# Altium PCB XbeeBed.PcbDoc
Units mm, origin at the board's own origin, x right, y up, seen from the top; angles counter-clockwise.
Board outline 152.4 x 101.6 mm, 2 copper layers (Top Layer, Bottom Layer); 31 components, 23 nets, 137 pads, 9 vias.
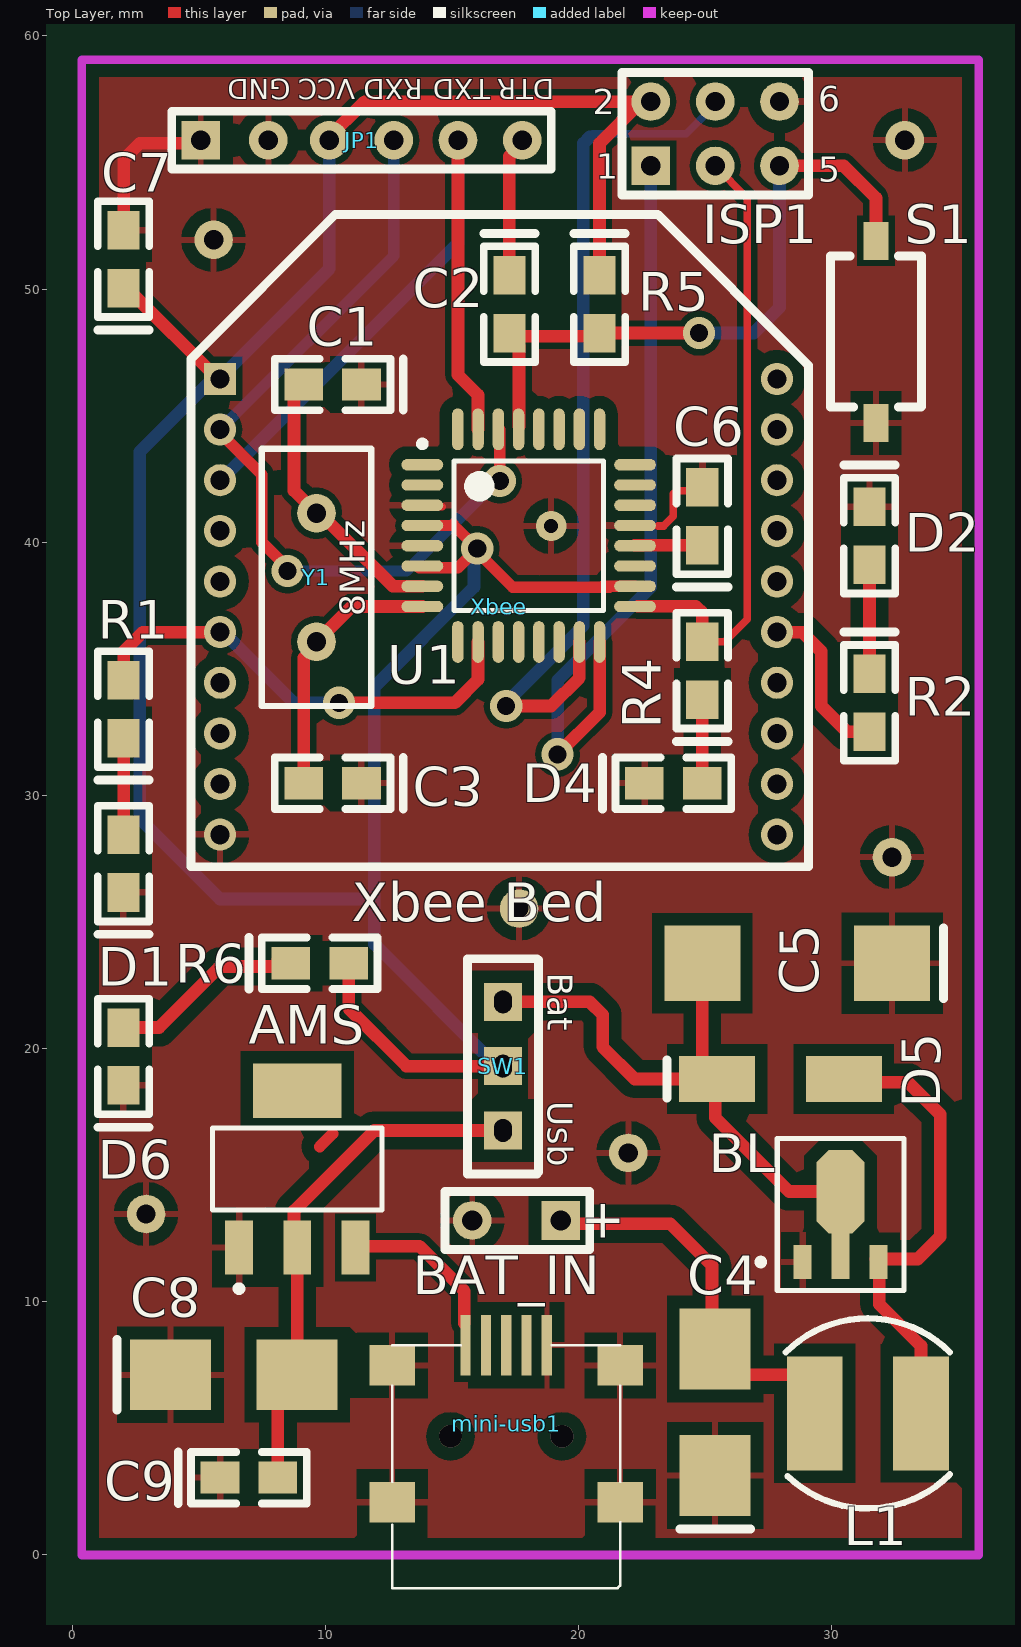
[diagram p0: Top Layer view]
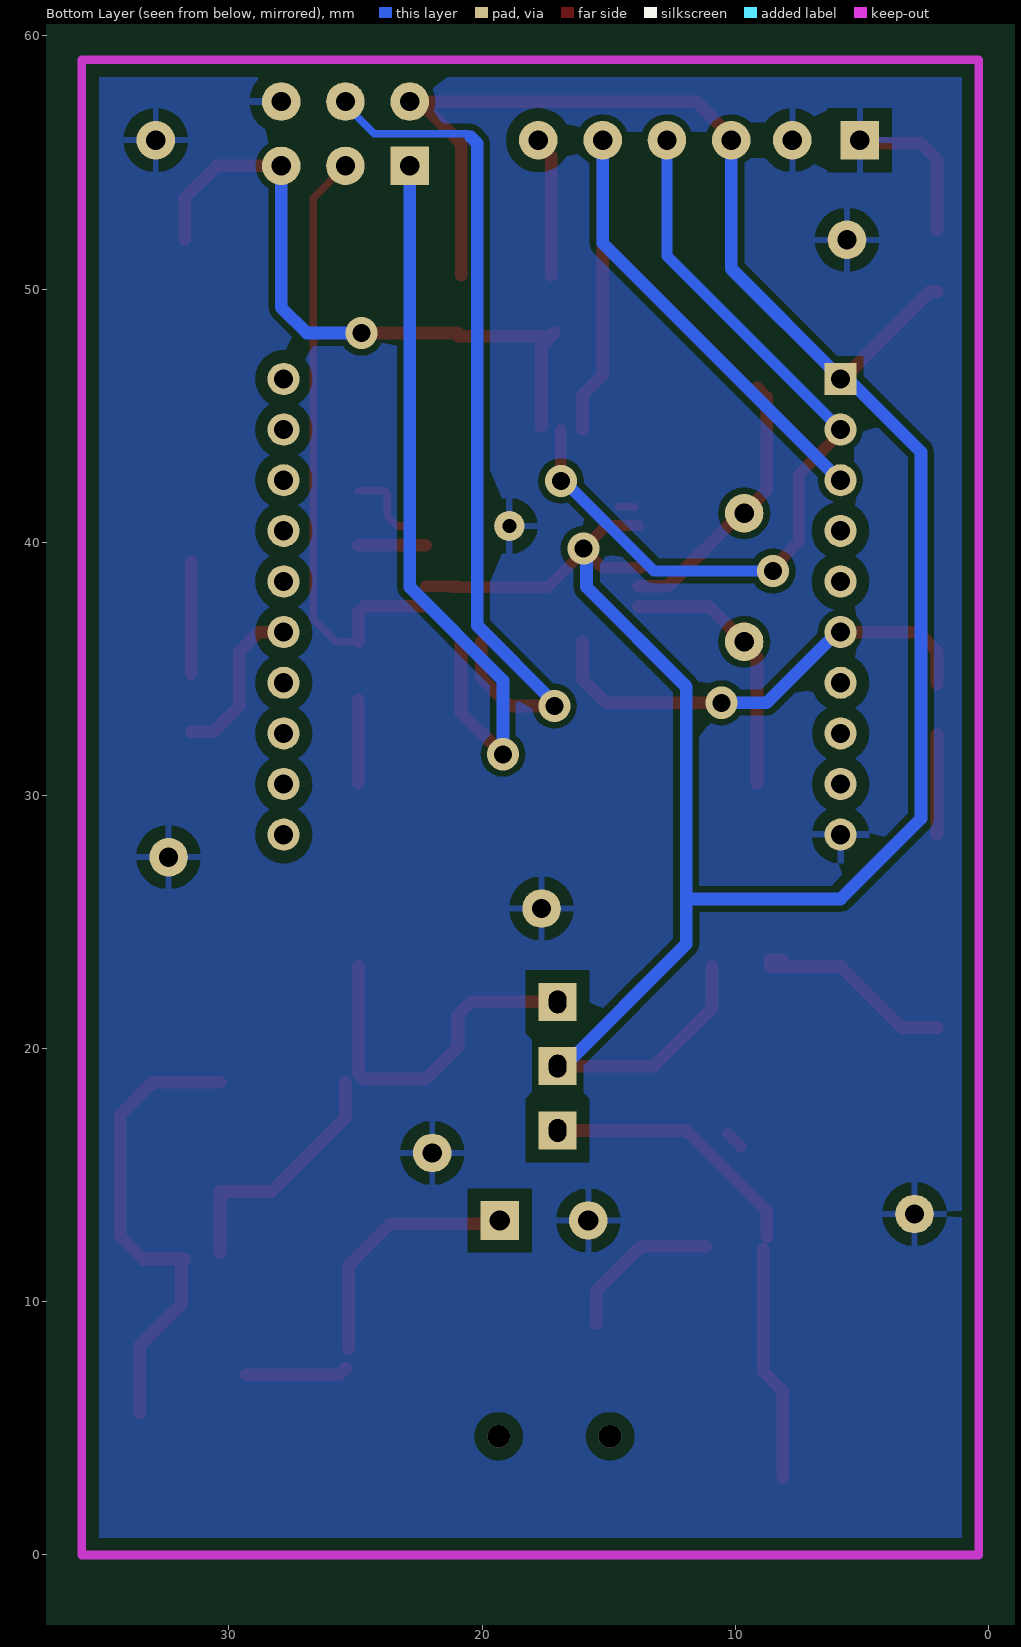
[diagram p1: Bottom Layer view, seen from below]

## Layer stack, top to bottom
Top Layer: signal copper 0.0356
Dielectric: dielectric 0.32, FR-4, Dk 4.8
Bottom Layer: signal copper 0.0356

## Board outline
-61.595,-22.733 90.805,-22.733 90.805,78.867 -61.595,78.867

## Design rules (kind name [scope] priority, off if disabled: settings)
Clearance Clearance_mega328 [(InNet('NetAMS_3'))  OR (InNet('TXD_PROMINI') OR InNet('RXD_PROMINI') OR InNet('NetC2_1') OR InNet('NetC6_2') OR InNet('NetISP1_3') OR InNet('NetISP1_1') OR InNet('NetISP1_4') OR InNet('RSSI') OR InNet('NetC3_1') OR InNet('NetC1_1'))] p1: gap=0.254
Clearance Clearance_vcc_mega328 [InNet('VCC')] p2: gap=0.254
Clearance Clearance_normal [Not (InComponent('U1'))] p3: gap=0.5
ComponentClearance [All] p1: gap=0.254 collisioncheckmode=3 verticalgap=0.254
PolygonConnect [All] p1: connectstyle=Relief reliefconductorwidth=0.254 reliefentries=4 polygonreliefangle="90 Angle"
RoutingVias [All] p1: holewidth=0.711 width=1.27 viastyle="Through Hole" minholewidth=0.711 minwidth=1.27 maxholewidth=0.711 maxwidth=1.27
SolderMaskExpansion [All] p1: expansion=0.102
TestPointUsage [All] p1: valid=0 allowmultiple=FALSE
Testpoint [All] p1: side=15 testpointundercomponent=TRUE minsize=1.016 maxsize=2.54 preferedsize=1.524 minholesize=0 maxholesize=1.016 preferedholesize=0.813 testpointgrid=0.025 style=1023 order=0-112345678
Width Width_mega328 [(InComponent('U1'))] p1: maxlimit=0.5 minlimit=0.3 preferedwidth=0.3
Width Width_normal [Not InComponent('U1')] p2: maxlimit=1 minlimit=0.3 preferedwidth=0.5
18 further rules are at their usual default settings.

## Components (designator, comment, footprint, x,y, rotation, side; value= is the part's Value field where it differs from the comment)
AMS "AMS1117-3.3CD" SOT223 8.89,15.24 r0 top
BAT_IN "BATTERY INPUT" vbat_in 19.304,13.208 r180 top
BL "BL8530-331SM" SOT89 30.353,12.954 r0 top
C1 "Cap" 0805#1 9.144,46.228 r90 top
C2 "Cap" 0805#1 17.272,48.26 r180 top
C3 "Cap" 0805#1 9.144,30.48 r90 top
C4 "Cap Pol3" "tan-c type" 25.4,8.128 r270 top
C5 "Cap Pol3" "tan-d type" 24.892,23.368 r0 top
C6 "Cap" 0805#1 24.892,42.164 r0 top
C7 "Cap" 0805#1 2.032,52.324 r0 top
C8 "Cap Pol3" "tan-c type" 8.89,7.112 r180 top
C9 "Cap" 0805#2 8.128,3.048 r90 top
D1 "LED2" 0805#1 2.032,28.448 r0 top
D2 "LED2" 0805#1 31.496,39.116 r180 top
D4 "LED2" 0805#2 24.892,30.48 r90 top
D5 "1N5819" 1n5819 30.48,18.796 r180 top
D6 "LED2" 0805#2 2.032,20.828 r180 top
ISP1 "ISP INTERFACE" icsp 22.86,54.864 r0 top
JP1 "FTDI Basic" ftdi-basic -10.16,55.88 r90 top
L1 "Inductor" 33uh-cd43 33.528,5.588 r180 top
mini-usb1 "miniusb" "mini USB" 17.145,4.699 r90 top
R1 "Res1" 0805#1 2.032,34.544 r0 top
R2 "Res1" 0805#1 31.496,32.512 r180 top
R4 "Res1" 0805#2 24.892,36.068 r180 top
R5 "Res1" 0805#1 20.828,48.26 r180 top
R6 "Res1" 0805#1 10.922,23.368 r270 top
S1 "SW-PB" sw-pb 31.75,44.704 r90 top
SW1 "Switch" switch 17.018,21.844 r270 top
U1 "ATmega328p-au" atmega328 12.7,34.925 r0 top
Xbee "Xbee" xbee 5.842,28.448 r0 top
Y1 "XTAL" 8MHz 9.652,41.148 r270 top

## Footprints (in the part's own frame and the unit in brackets; to place one, negate y for a bottom-side part, rotate by r counter-clockwise, add the part's x,y. Pads: shape width x height; smd on the part's side, far side on the other; paste and mask are expansions set on the pad)
1n5819 [mm]
  rect 3x1.8 smd: 1(0,0) 2(5,0)
  silkscreen extent 6.98,-0.76 6.98,0.76
8MHz [mil]
  round 60 hole 30: 1(0,0) 2(200,0)
  silkscreen extent -100,-85 300,85
33uh-cd43 [mm]
  rect 2.2x4.5 smd: 1(0,0) 2(4.2,0)
  silkscreen extent -1.14,-3.75 5.33,3.75
0805#1 [mil]
  rect 50x60 smd: 1(0,0) 2(0,-90)
  silkscreen extent -40,-155 40,45
0805#2 [mil]
  rect 50x60 smd: 1(0,0) 2(0,90)
  silkscreen extent -40,-45 40,155
atmega328 [mm]
  oval 1.65x0.45 smd: 1(1.134,8.134) 2(1.134,7.334) 3(1.134,6.534) 4(1.134,5.734) 5(1.134,4.934) 6(1.134,4.134) 7(1.134,3.334) 8(1.134,2.534) 17(9.534,2.534) 18(9.534,3.334) 19(9.534,4.134) 20(9.534,4.934) 21(9.534,5.734) 22(9.534,6.534) 23(9.534,7.334) 24(9.534,8.134)
  oval 0.45x1.65 smd: 9(2.534,1.134) 10(3.334,1.134) 11(4.134,1.134) 12(4.934,1.134) 13(5.734,1.134) 14(6.534,1.134) 15(7.334,1.134) 16(8.134,1.134) 25(8.134,9.534) 26(7.334,9.534) 27(6.534,9.534) 28(5.734,9.534) 29(4.934,9.534) 30(4.134,9.534) 31(3.334,9.534) 32(2.534,9.534)
  silkscreen extent 1.01,2.38 8.28,9.08, body extent 1.83,1.83 8.83,8.83, height 1.2
ftdi-basic [mil]
  rect 60x60 hole 30: 1(0,-600)
  round 60 hole 30: 2(0,-705) 3(0,-800) 4(0,-900) 5(0,-1000) 6(0,-1100)
  silkscreen extent -45,-1145 45,-555
icsp [mil]
  rect 60x60 hole 30: 1(0,0)
  round 60 hole 30: 2(0,100) 3(100,0) 4(100,100) 5(200,0) 6(200,100)
  silkscreen extent -45,-45 245,145
"mini USB" [mm]
  rect 2.4x0.4 smd: 1(3.583,1.6) 2(3.583,0.8) 3(3.583,0) 4(3.583,-0.8) 5(3.583,-1.6)
  rect 1.6x1.8 smd: 6(2.783,-4.5) 7(2.783,4.5) 8(-2.617,4.5) 9(-2.617,-4.5)
  silkscreen extent -6.02,-4.5 3.58,4.5
SOT89 [mm] "SOT-89; Body 4.6 x 4.25 mm, inc. leads (LxW max)"
  oct 1.9x3.3 smd: 0(0,1.388)
  rect 0.7x1.35 smd: 1(-1.5,-1.388) 3(1.5,-1.388)
  rect 0.7x1.8 smd: 2(0,-1.163)
  silkscreen extent -3.27,-2.51 2.5,3.49
SOT223 [mm] "SOT-223/SC-73; 4 Leads; Body 6.7 x 7.3 mm, inc. leads (LxW max)"
  rect 1.1x2.15 smd: 1(-2.3,-3.1) 2(0,-3.1) 3(2.3,-3.1)
  rect 3.5x2.15 smd: 4(0,3.1)
  silkscreen extent -3.35,-4.85 3.35,1.62
sw-pb [mm]
  rect 1.5x1 smd: 1(0,0) 2(7.2,0)
  silkscreen extent 0.63,-1.8 6.6,1.8
switch [mm]
  rect 1.5x1.5 hole 0.7 slot 0.9 at 0 deg: 1(2.54,0) 2(0,0) 3(5.08,0)
  silkscreen extent -1.7,-1.4 6.8,1.4
"tan-c type" [mm]
  rect 3.2x2.8 smd: 1(0,0) 2(5,0)
  silkscreen extent 7.11,-1.4 7.11,1.4
"tan-d type" [mm]
  rect 3x3 smd: 1(0,0) 2(7.5,0)
  silkscreen extent 9.53,-1.4 9.53,1.4
vbat_in [mil]
  rect 60x60 hole 31.5: 1(0,0)
  round 60 hole 31.5: 2(137.8,0)
  silkscreen extent -45,-45 180,45
xbee [mm]
  rect 1.27x1.27 hole 0.76: 1(0,18)
  round 1.27 hole 0.76: 2(0,16) 3(0,14) 4(0,12) 5(0,10) 6(0,8) 7(0,6) 8(0,4) 9(0,2) 10(0,0) 11(22,0) 12(22,2) 13(22,4) 14(22,6) 15(22,8) 16(22,10) 17(22,12) 18(22,14) 19(22,16) 20(22,18)
  silkscreen extent -1.14,-1.27 23.24,24.5

## Part data
BAT_IN: library part BAT_IN
C1 C2 C3 C6 C7 C9: "Capacitor"
C4 C5 C8: "Polarized Capacitor (Surface Mount)"
D1 D2 D4 D6: "Typical RED, GREEN, YELLOW, AMBER GaAs LED"
D5: library part "Diode 11DQ03", "Schottky Rectifier"
ISP1: library part ISP
mini-usb1: library part Mini-Usb
R1 R2 R4 R5 R6: "Resistor"
S1: "Switch"
SW1: library part SW
U1: library part ATmega8-16AC, "8-Bit AVR Microcontroller with 8K Bytes of In-System Programmable Flash Memory"
Xbee: library part Component_1
Y1: "Crystal Oscillator"

## Free pads (board coordinates)
  round 1.2 hole 0.55: 1(18.923,40.64)
  round 1.524 hole 0.762: 2(32.385,27.559) 3(5.588,51.943) 4(2.921,13.462) 5(17.653,25.527) 6(21.971,15.875) 7(32.893,55.88)

## Via types
v1: diameter 1.27, hole 0.711, Top Layer to Bottom Layer, 7 vias
v2: diameter 0.9, hole 0.9, Top Layer to Bottom Layer, 2 vias

## Nets (pads, with @x,y where several pads share a name; then routed paths per layer and width w, separated by ;. In a path a pad name is that pad's centre, name@x,y a point inside that pad or via, vN(x,y) a via of type N, cw(c..) or ccw(c..) an arc to the next point about the centre after c; other vN are vias at no path point)
GND: AMS.1 BAT_IN.2 BL.1 C1.2 C3.2 C4.2 C5.2 C6.1 C7.1 C8.2 C9.2 D1.2 D2.2 D4.2 D6.2 ISP1.6 JP1.1 JP1.2 mini-usb1.5 mini-usb1.6 mini-usb1.7 mini-usb1.8 mini-usb1.9 pad.1 pad.2 pad.3 pad.4 pad.5 pad.6 pad.7 S1.1 U1.3 U1.5 U1.21 Xbee.10 | length 9.7
  Top Layer w0.3: U1.3@13.97,41.402 U1.3@14.611,41.402 ; 23.142,40.64 23.368,40.64 23.749,41.021 23.749,41.91 23.876,42.037 C6.1@24.892,42.037
  Top Layer w0.5: C7.1 2.032,55.118 2.667,55.753 JP1.1@5.207,55.753
NetAMS_3: AMS.3 mini-usb1.1 | length 6.3
  Top Layer w0.5: AMS.3@11.176,12.192 13.716,12.192 15.494,10.414 mini-usb1.1@15.494,9.144
NetBAT_IN_1: BAT_IN.1 C4.1 L1.2 | length 14
  Top Layer w0.5: BAT_IN.1@19.304,13.081 23.622,13.081 25.273,11.43 C4.1@25.273,8.128 ; C4.1@25.4,7.366 25.654,7.112 L1.2@29.337,7.112
NetBL_3: BL.3 D5.1 L1.1 | length 18.9
  Top Layer w0.5: D5.1@30.353,18.669 33.02,18.669 34.29,17.399 34.29,12.573 33.401,11.684 BL.3@31.75,11.684 ; BL.3@31.877,11.557 31.877,9.906 33.528,8.255 L1.1
NetC1_1: C1.1 U1.7 Y1.1 | length 10.9
  Top Layer w0.5: C1.1@9.144,46.101 8.763,45.72 8.763,42.037 Y1.1 ; Y1.1@9.652,41.275 12.668,38.259 U1.7
NetC2_1: C2.1 ISP1.5 R5.1 S1.2 U1.29 | length 26.7
  Top Layer w0.5: C2.1@17.145,48.26 17.653,47.752 U1.29@17.653,44.577 ; C2.1@17.272,48.133 R5.1@20.955,48.133 ; R5.1@20.955,48.26 v1(24.765,48.26) ; ISP1.5@27.813,54.864 30.48,54.864 31.75,53.594 S1.2@31.75,51.943
  Bottom Layer w0.5: v1(24.765,48.26) 26.924,48.26 27.94,49.276 ISP1.5
NetC2_2: C2.2 JP1.6 | length 5.6
  Top Layer w0.5: C2.2 17.272,55.245 JP1.6@17.907,55.88
NetC3_1: C3.1 U1.8 Y1.2 | length 10.6
  Top Layer w0.5: C3.1 9.144,35.433 Y1.2@9.779,36.068 ; Y1.2 11.043,37.459 U1.8
NetC6_2: C6.2 U1.20 | length 2.7
  Top Layer w0.5: U1.20@22.225,39.878 C6.2
NetD1_1: D1.1 R1.2 | length 3.9
  Top Layer w0.5: D1.1 R1.2@2.032,32.385
NetD2_1: D2.1 R2.2 | length 4.4
  Top Layer w0.5: R2.2 D2.1@31.496,39.243
NetD4_1: D4.1 R4.2 | length 3.3
  Top Layer w0.5: D4.1 R4.2
NetD6_1: D6.1 R6.2 | length 8
  Top Layer w0.5: D6.1 3.429,20.828 5.779,23.177 ; 5.842,23.241 R6.2@8.636,23.241 ; R6.2@8.128,23.495 R6.2@8.636,23.495
NetISP1_1: ISP1.1 U1.16 | length 29.8
  Top Layer w0.5: v1(19.177,31.623) 20.834,33.28 U1.16
  Bottom Layer w0.5: v1(19.177,31.623) 19.177,34.544 22.86,38.227 ISP1.1@22.86,54.737
NetISP1_3: ISP1.3 R4.1 U1.17 | length 24.4
  Top Layer w0.3: R4.1 25.781,36.068 26.67,36.957 26.67,53.594 ISP1.3
  Top Layer w0.5: U1.17@22.352,37.465 24.638,37.465 24.892,37.211 R4.1
NetISP1_4: ISP1.4 U1.15 | length 33.8
  Top Layer w0.5: v1@17.272,33.528 18.923,33.528 20.034,34.639 U1.15
  Bottom Layer w0.3: 20.447,56.007 20.574,56.134 24.257,56.134 25.4,57.277 ISP1.4
  Bottom Layer w0.5: v1@17.145,33.655 20.193,36.703 20.193,37.719 ; 20.193,37.846 20.193,55.753 20.447,56.007
  other v1: 17.145,33.528
NetR2_1: R2.1 Xbee.15 | length 6.5
  Top Layer w0.5: Xbee.15@27.813,36.449 28.829,36.449 29.591,35.687 ; 29.591,35.56 29.591,33.528 30.607,32.512 R2.1
RSSI: R1.1 U1.10 Xbee.6 | length 18.6
  Top Layer w0.5: R1.1@2.032,34.417 2.032,35.687 2.793,36.448 Xbee.6 ; v1(10.541,33.655) 15.113,33.655 16.034,34.576 U1.10
  Bottom Layer w0.5: Xbee.6 5.97,36.448 8.763,33.655 v1(10.541,33.655)
RXD_PROMINI: JP1.4 U1.30 Xbee.2 | length 33.2
  Top Layer w0.45: Xbee.2@5.842,44.45 5.842,44.323 7.493,42.672 7.493,40.005 v1@8.509,38.989 ; v1@16.891,42.672 U1.30@16.891,44.45
  Bottom Layer w0.45: Xbee.2@5.715,44.45 5.842,44.45 12.7,51.308 JP1.4@12.7,56.007 ; Xbee.2@5.969,44.45 Xbee.2@5.969,44.831 ; v1(8.509,38.862) 13.208,38.862 v1@16.891,42.545
  other v1: 16.891,42.418
TXD_PROMINI: JP1.5 U1.31 Xbee.3 | length 29.2
  Top Layer w0.5: JP1.5@15.24,56.007 15.24,46.609 16.034,45.815 U1.31
  Bottom Layer w0.5: Xbee.3@5.842,42.418 15.24,51.816 JP1.5
V_BAT: BL.0 BL.2 C5.1 D5.2 SW1.2 | length 24.1
  Top Layer w0.5: SW1.2 20.447,21.844 20.955,21.336 20.955,20.066 22.225,18.796 24.638,18.796 24.892,19.05 C5.1@24.892,23.241 ; D5.2@25.4,18.669 25.4,17.272 28.321,14.351 BL.0@30.353,14.351 ; BL.0@30.226,14.224 30.353,14.097 BL.2@30.353,11.938
V_USB: AMS.2 C8.1 C9.1 SW1.3 | length 19.9
  Top Layer w0.5: C9.1 8.128,6.477 8.89,7.239 AMS.2@8.89,12.065 ; AMS.2@8.763,12.573 8.763,13.589 11.938,16.764 SW1.3
VCC: C7.2 ISP1.2 JP1.3 R5.2 R6.1 SW1.1 U1.4 U1.6 U1.18 Xbee.1 | length 111.9
  Top Layer w0.45: U1.6@13.716,38.989 15.24,38.989 v1(16.002,39.751) 15.05,40.703 ; U1.4 14.986,40.659 ; v1@15.875,39.751 17.399,38.227 18.415,38.227 ; 18.542,38.227 21.209,38.227 ; 20.954,38.259 U1.18
  Top Layer w0.5: C7.2@2.032,49.911 2.286,49.911 Xbee.1@5.715,46.482 ; JP1.3@10.033,55.88 11.557,57.404 ISP1.2 ; R6.1@10.922,23.241 10.922,21.59 13.208,19.304 SW1.1@17.145,19.304 ; R5.2 20.828,55.753 ISP1.2@22.479,57.404
  Bottom Layer w0.5: JP1.3 10.16,50.8 5.842,46.482 5.588,46.482 2.667,43.561 2.667,29.083 5.842,25.908 11.811,25.908 ; v1@15.875,39.624 15.875,38.227 11.938,34.29 11.938,24.13 16.891,19.177 SW1.1@17.018,19.177
pads on no net: AMS.4 mini-usb1.2 mini-usb1.3 mini-usb1.4 U1.1 U1.2 U1.9 U1.11 U1.12 U1.13 U1.14 U1.19 U1.22 U1.23 U1.24 U1.25 U1.26 U1.27 U1.28 U1.32 Xbee.4 Xbee.5 Xbee.7 Xbee.8 Xbee.9 Xbee.11 Xbee.12 Xbee.13 Xbee.14 Xbee.16 Xbee.17 Xbee.18 Xbee.19 Xbee.20
copper on no net: | length 0.7
  Top Layer w0.45: 9.779,16.125 10.287,16.633 10.287,16.637
  other v2: 14.945,4.682 19.345,4.682

## Polygon pours and split planes (outlines as drawn)
GND on Top Layer "Bottom Layer-No Net" (solid, remove dead copper, pour order 1000): 0.381,0.127 0.381,59.055 35.814,59.055 35.814,0.127 0.381,0.127 0.381,-1.143 0.762,-1.524
GND on Bottom Layer "Bottom Layer-No Net" (solid, remove dead copper, pour order 1001): 0.381,0.127 0.381,59.055 35.814,59.055 35.814,0 0.508,0 0.381,0.127 0.254,0.254 -0.381,0.254

## Keep-outs
Keep-Out Layer:
  lines w0.35: 0.381,0 0.381,59.055 35.814,59.055 35.814,0 0.381,0

## Silkscreen, mask and mechanical layers (free items; w line width, h text height)
Top Overlay:
  text "Xbee Bed" at 11.049,25.019 h1.52
Drill Drawing:
  text ".Legend" at 3.429,-5.334 h1.52

## Text inside footprints (layer, text, board x,y; h text height)
BAT_IN: Top Overlay "+" at 21.844,13.843 h1.52 r180
ISP1: Top Overlay "6" at 29.464,57.023 h1; Top Overlay "5" at 29.464,54.229 h1; Top Overlay "2" at 20.574,56.896 h1; Top Overlay "1" at 20.701,54.356 h1
JP1: Top Overlay "GND" at 8.636,58.293 h0.8 r180; Top Overlay "VCC" at 11.176,58.293 h0.8 r180; Top Overlay "RXD" at 13.843,58.293 h0.8 r180; Top Overlay "TXD" at 16.51,58.293 h0.8 r180; Top Overlay "DTR" at 19.05,58.293 h0.8 r180
SW1: Top Overlay "Usb" at 18.796,17.907 h1 r270; Top Overlay "Bat" at 18.796,22.987 h1 r270
Y1: Top Overlay "8MHz" at 11.557,37.084 h1 r90